# Altium PCB PCB1.PcbDoc
Units mm, origin at the board's own origin, x right, y up, seen from the top; angles counter-clockwise.
Board outline 31.75 x 26.67 mm, 2 copper layers (Top Layer, Bottom Layer); 8 components, 6 nets, 19 pads, 0 vias.
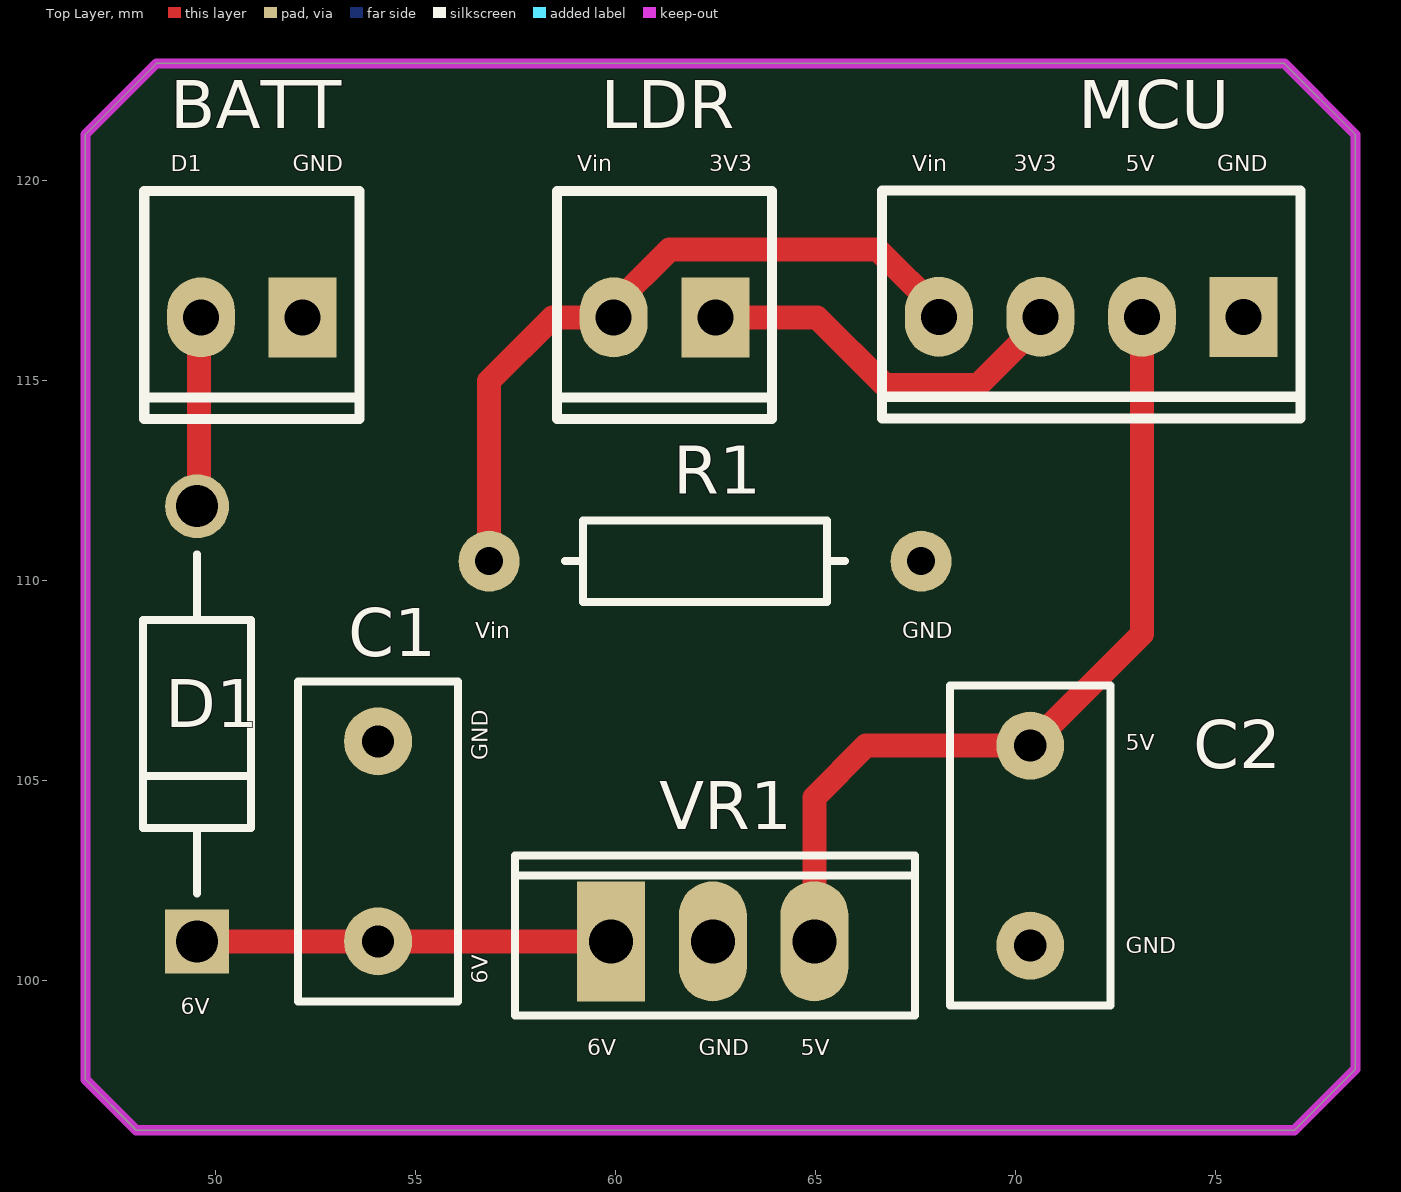
[diagram p0: Top Layer view]
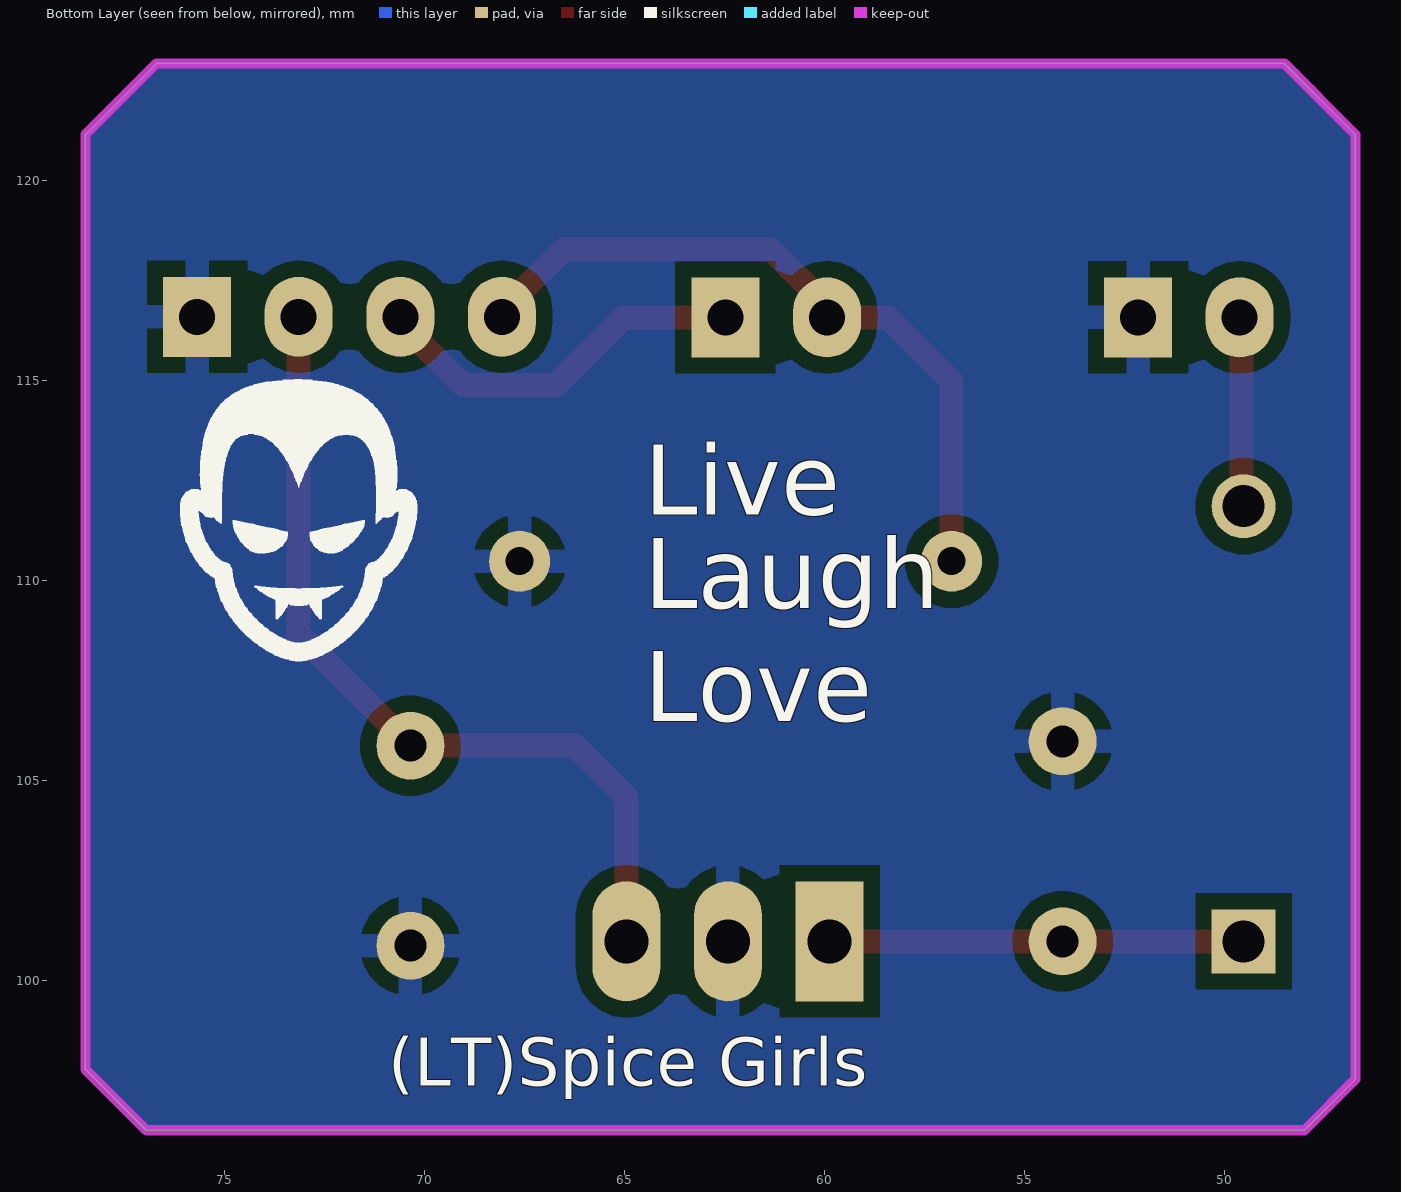
[diagram p1: Bottom Layer view, seen from below]
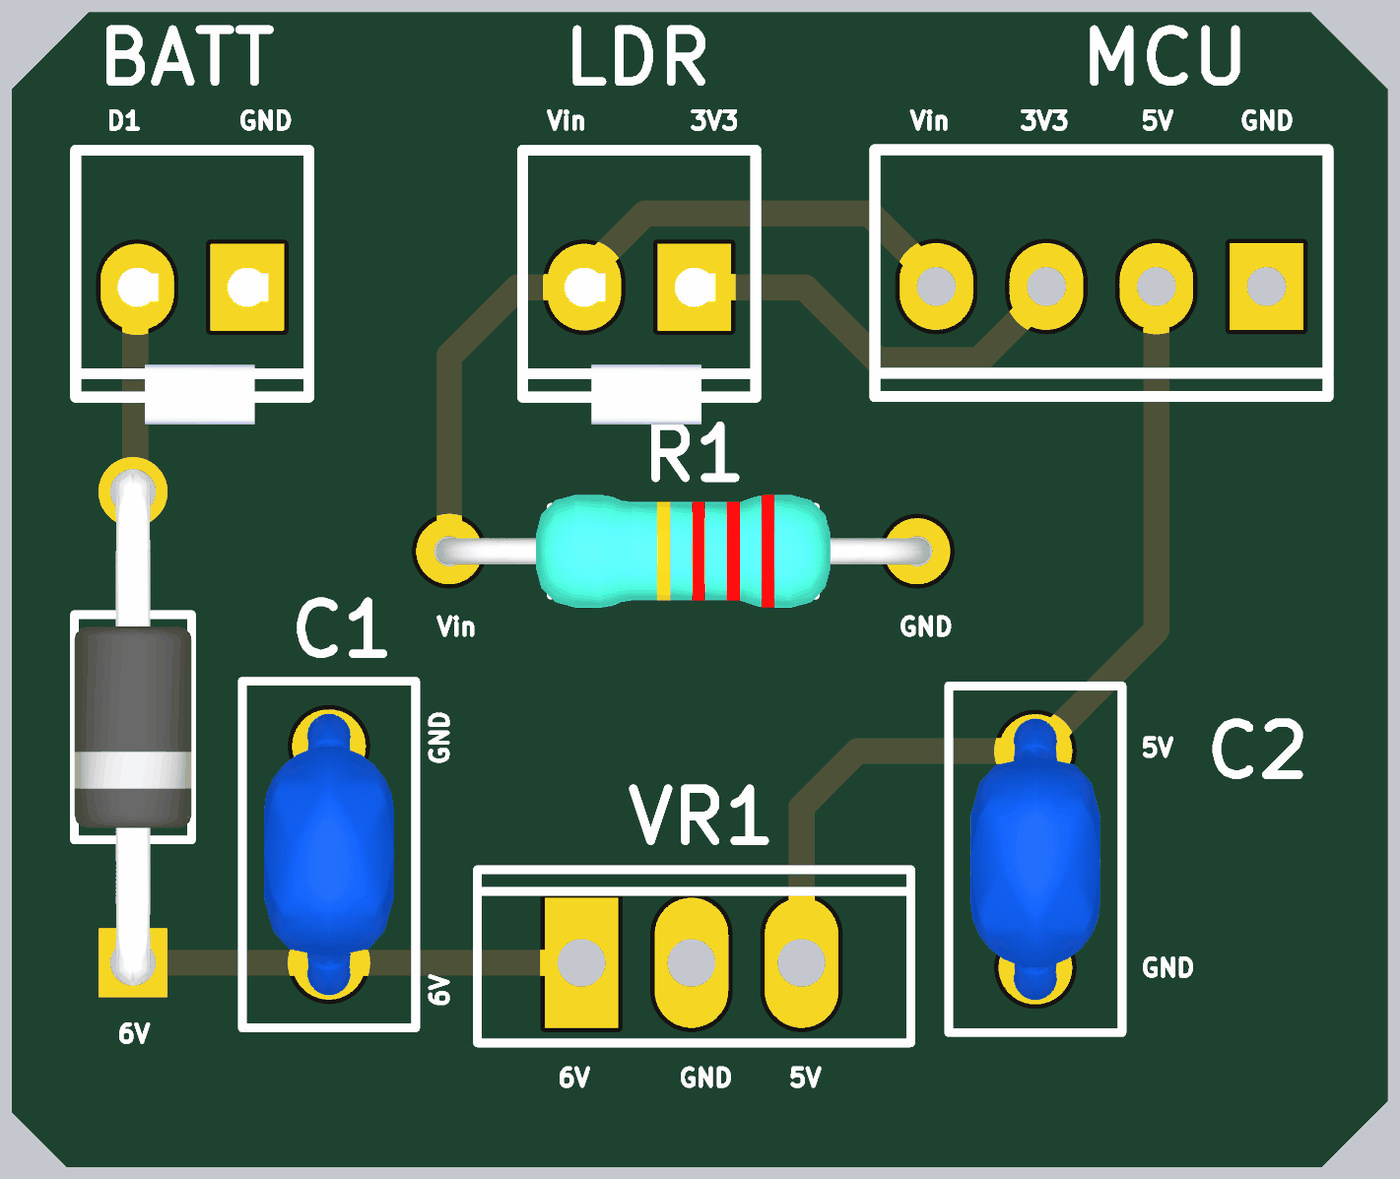
[diagram p2: 3D render of the assembled board from above, using the file's embedded part models]

## Layer stack, top to bottom
Top Solder: solder mask 0.0102, Solder Resist, Dk 3.5
Top Layer: signal copper 0.0356
Dielectric 1: dielectric 0.32, FR-4, Dk 4.8
Bottom Layer: signal copper 0.0356
Bottom Solder: solder mask 0.0102, Solder Resist, Dk 3.5

## Board outline
48.006,96.266 46.736,97.536 46.736,121.158 48.514,122.936 76.708,122.936 78.486,121.158 78.486,97.79 76.962,96.266

## Design rules (kind name [scope] priority, off if disabled: settings)
Clearance [All] p1: gap=0.4 ignorepadtopadclearanceinfootprint=FALSE
Height [All] p1: minheight=0 maxheight=200 prefheight=12.7
HoleSize [All] p1: absolutevalues=TRUE maxlimit=10 minlimit=0.4 maxpercent=80.000 minpercent=20.000
PolygonConnect [All] p1: connectstyle=Relief reliefconductorwidth=0.6 reliefentries=4 polygonreliefangle="90 Angle" airgapwidth=0.4
RoutingVias [All] p1: holewidth=0.711 width=1.27 viastyle="Through Hole" minholewidth=0.711 minwidth=1.27 maxholewidth=0.711 maxwidth=1.27
SilkToSilkClearance [All] p1: silktosilkclearance=0.1
SilkToSolderMaskClearance [IsPad] p1: minsilkscreentomaskgap=0.01 clearancetoexposedcopper=TRUE
SolderMaskExpansion [All] p1: expansion=0.102 istentingtop=FALSE
SupplyNets "Schematic Supply Nets_4" [InNet('Vin')] p1: voltage=0.000
SupplyNets "Schematic Supply Nets_3" [InNet('3V3')] p2: voltage=0.000
SupplyNets "Schematic Supply Nets_2" [InNet('GND')] p3: voltage=0.000
SupplyNets "Schematic Supply Nets_1" [InNet('6V')] p4: voltage=0.000
SupplyNets "Schematic Supply Nets" [InNet('5V')] p5: voltage=0.000
Width [All] p1: maxlimit=10 minlimit=0.4 preferedwidth=0.6
26 further rules are at their usual default settings.

## Components (designator, comment, footprint, x,y, rotation, side; value= is the part's Value field where it differs from the comment)
BATT "2 Way" ECE-600102STTH 52.167,116.586 r270 top (schematic designator P1)
C1 "0.33uF" CCAP-5P0 54.053,103.488 r90 top
C2 "0.1uF" CCAP-5P0 70.358,103.378 r270 top
D1 "1N4007" 1N4007-MFG 49.53,106.426 r90 top
LDR "2 Way" ECE-600102STTH 62.484,116.586 r270 top (schematic designator P2)
MCU "4 Way" ECE-600104STTH 75.692,116.601 r270 top (schematic designator P3)
R1 "27k" AXIAL-0.4 62.23,110.49 r180 top
VR1 "L7805CV" ECE-TO220ABTH 59.881,100.988 r0 top

## Footprints (in the part's own frame and the unit in brackets; to place one, negate y for a bottom-side part, rotate by r counter-clockwise, add the part's x,y. Pads: shape width x height; smd on the part's side, far side on the other; paste and mask are expansions set on the pad)
1N4007-MFG [mm]
  round 1.6 hole 1.05 paste-2539.97 mask+0: 1(5.438,0)
  rect 1.6x1.6 hole 1.05 paste-2539.97 mask+0: 2(-5.438,0)
  silkscreen extent -4.24,-1.35 4.24,1.35, body extent -6.34,-1.45 6.34,1.45, height 0.25
AXIAL-0.4 [mm]
  round 1.524 hole 0.7: 1(-5.4,0) 2(5.4,0)
  silkscreen extent -3.5,-1.02 3.5,1.02, body extent -5.7,-1.3 5.7,1.3, height 2.7
CCAP-5P0 [mm]
  round 1.7 hole 0.8: 1(-2.5,0) 2(2.5,0)
  silkscreen extent -4,-2 4,2, body extent -3.25,-1.5 3.25,1.5, height 6.5
ECE-600102STTH [mm] "Polarised Header 2 way"
  rect 2x1.7 hole 0.9: 1(0,0)
  oval 2x1.7 hole 0.9: 2(0,-2.54)
  silkscreen extent -3.16,-3.96 2.54,1.42, body extent -3.3,-3.64 3.17,1.44, height 7.39
ECE-600104STTH [mm] "Polarised Header 4 way"
  rect 2x1.7 hole 0.9: 1(0,0)
  oval 2x1.7 hole 0.9: 2(0,-2.54) 3(0,-5.08) 4(0,-7.62)
  silkscreen extent -3.16,-9.04 2.54,1.42
ECE-TO220ABTH [mm] "Transistor TO220"
  rect 1.7x3 hole 1.1: 1(0,0)
  oval 1.7x3 hole 1.1: 2(2.54,0) 3(5.08,0)
  silkscreen extent -2.4,-1.85 7.6,2.15

## Part data
BATT LDR: library part CON000001, "HEADER POLARISED 2WAY TH", Manufactuer=GTK, Manufacturer-PN=600102ST, Size/Package="2.54 Radial", Assembly Method="Through hole", Category=Connector, Component Type=NA, Datasheet Link=http://share.engineering.auckland.ac.nz/ece/ts/Student%20Documents/polarised_connectors.pdf, Item Type=Item, Path="ece/ts/Lists/Stock Inventory", Status=Active, Supplier1=Elecon, Supplier1-PN=YY3N02, Supplier2="Active Components", Supplier2-PN=600102ST, UoA Stock#=CON000001
C1 C2: library part CerCap_TH_5P0, "TH ceramic capacitor with 5mm pitch"
D1: library part 1N4007_TH_4AX0, "1N4007 1000V standard axial diode", Supplier Part Number 1=1N4007RLGOSCT-ND, ComponentLink1Description=https://www.fairchildsemi.com/datasheets/1N/1N914.pdf, ComponentLink1URL=https://www.fairchildsemi.com/datasheets/1N/1N914.pdf, Supplier 1=Digi-Key
MCU: library part CON000003, "HEADER POLARISED 4WAY TH", Manufactuer=GTK, Manufacturer-PN=600104ST, Size/Package="2.54 Radial", Assembly Method="Through hole", Category=Connector, Component Type=NA, Datasheet Link=http://share.engineering.auckland.ac.nz/ece/ts/Student%20Documents/polarised_connectors.pdf, Item Type=Item, Path="ece/ts/Lists/Stock Inventory", Status=Active, Supplier1=Elecon, Supplier1-PN=YY3N04, Supplier2="Active Components", Supplier2-PN=600104ST, UoA Stock#=CON000003
R1: library part Res_TH_0AX4, "Through hole resistor", ComponentLink1Description=http://www.royalohm.com/pdf/product2017/PrecisionMetalMF.pdf, LatestRevisionDate=17-Jul-2002, LatestRevisionNote="Re-released for DXP Platform.", PackageReference=AXIAL-0.4, Published=8-Jun-2000, Publisher="Altium Limited"
VR1: library part REG000007, "REG POSITIVE 5V TO220", Manufactuer="ST Microelectronics", Size/Package=TO220, Voltage/Current=5V/1.5A, Assembly Method="Through hole", Category=Regulator, Item Type=Item, Manufacturer-PN=L7805CV, Path="ece/ts/Lists/Stock Inventory", Status=Active, Supplier1=Digikey, Supplier1-PN=497-1443-5-ND, UoA Stock#=REG000007

## Nets (pads, with @x,y where several pads share a name; then routed paths per layer and width w, separated by ;. In a path a pad name is that pad's centre, name@x,y a point inside that pad or via, vN(x,y) a via of type N, cw(c..) or ccw(c..) an arc to the next point about the centre after c; other vN are vias at no path point)
3V3: LDR.1 MCU.3 | length 9.6
  Top Layer w0.6: LDR.1 65.032,116.586 66.717,114.901 69.062,114.901 70.612,116.451 MCU.3
5V: C2.1 MCU.2 VR1.3 | length 21.4
  Top Layer w0.6: VR1.3 64.961,104.585 66.254,105.878 C2.1 73.152,108.672 MCU.2
6V: C1.1 D1.2 VR1.1 | length 10.4
  Top Layer w0.6: D1.2 C1.1 VR1.1
GND: BATT.1 C1.2 C2.2 MCU.1 R1.1 VR1.2
NetBATT_2: BATT.2 D1.1 | length 4.8
  Top Layer w0.6: D1.1 49.579,111.913 49.579,116.538 BATT.2
Vin: LDR.2 MCU.4 R1.2 | length 18.1
  Top Layer w0.6: R1.2 56.83,114.996 58.42,116.586 LDR.2 59.944,116.886 61.344,118.286 66.537,118.286 68.072,116.751 MCU.4

## Polygon pours and split planes (outlines as drawn)
GND on Bottom Layer "GND_L02_P000" (solid, remove dead copper, pour order 0): 48.514,122.936 46.736,121.158 46.736,97.536 48.006,96.266 76.962,96.266 78.486,97.79 78.486,121.158 76.708,122.936

## Keep-outs
Top Layer:
  lines w0.254: 46.736,97.536 48.006,96.266 76.962,96.266 78.486,97.79 78.486,121.158 76.708,122.936 49.022,122.936 48.514,122.936 46.736,121.158 46.736,107.442 46.736,97.536
Keep-Out Layer:
  the board outline again, w0.254

## Other copper
Top Layer:

## Silkscreen, mask and mechanical layers (free items; w line width, h text height)
Top Overlay:
  text "D1" at 48.868,120.242 h0.4
  text "GND" at 51.916,120.242 h0.4
  text "Vin" at 59.028,120.242 h0.4
  text "3V3" at 62.33,120.242 h0.4
  text "Vin" at 67.41,120.242 h0.4
  text "3V3" at 69.95,120.242 h0.4
  text "5V" at 72.744,120.242 h0.4
  text "GND" at 75.03,120.242 h0.4
  text "Vin" at 56.488,108.558 h0.4
  text "GND" at 67.156,108.558 h0.4
  text "5V" at 72.744,105.764 h0.4
  text "GND" at 56.796,105.51 h0.4 r90
  text "GND" at 72.744,100.684 h0.4
  text "6V" at 56.796,99.922 h0.4 r90
  text "6V" at 49.122,99.16 h0.4
  text "6V" at 59.282,98.144 h0.4
  text "GND" at 62.076,98.144 h0.4
  text "5V" at 64.616,98.144 h0.4
Bottom Overlay:
  drawing of 4 lines, arcs and shapes, not listed
  text "Live" at 64.513,111.081 h3
  text "Laugh" at 64.513,108.743 h3
  text "Love" at 64.513,105.918 h3
  text "(LT)Spice Girls" at 70.92,97.374 h1.2
Mechanical 1:
  the board outline again, w0.254